# Altium PCB SC8701_EVM_RE0.PcbDoc
Units mil, origin at the board's own origin, x right, y up, seen from the top; angles counter-clockwise.
Board outline 3200 x 2300 mil, 4 copper layers (Top Layer, Signal Layer 1, Signal Layer 2, Bottom Layer), stack 62.449 mil thick; 107 components, 47 nets, 342 pads, 572 vias.
Unrouted connection lines stored in the file: 2.
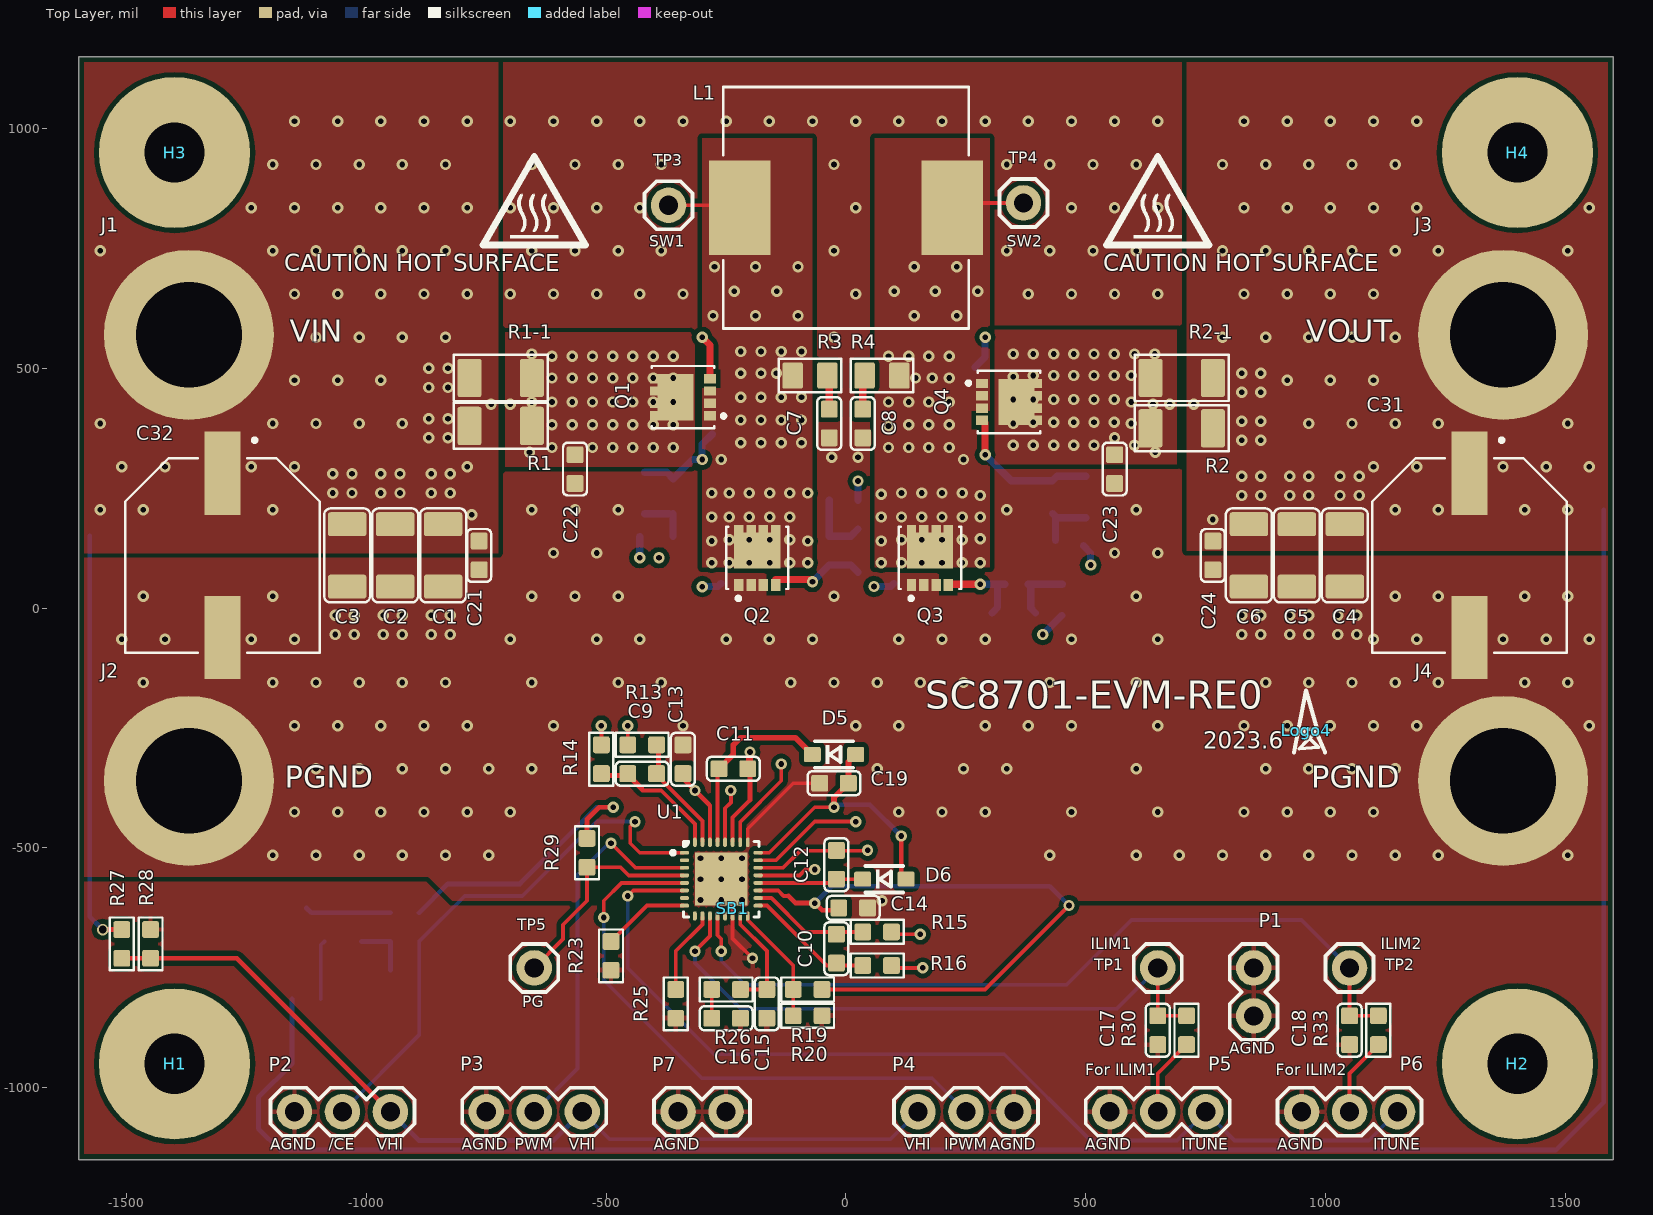
[diagram p0: Top Layer view]
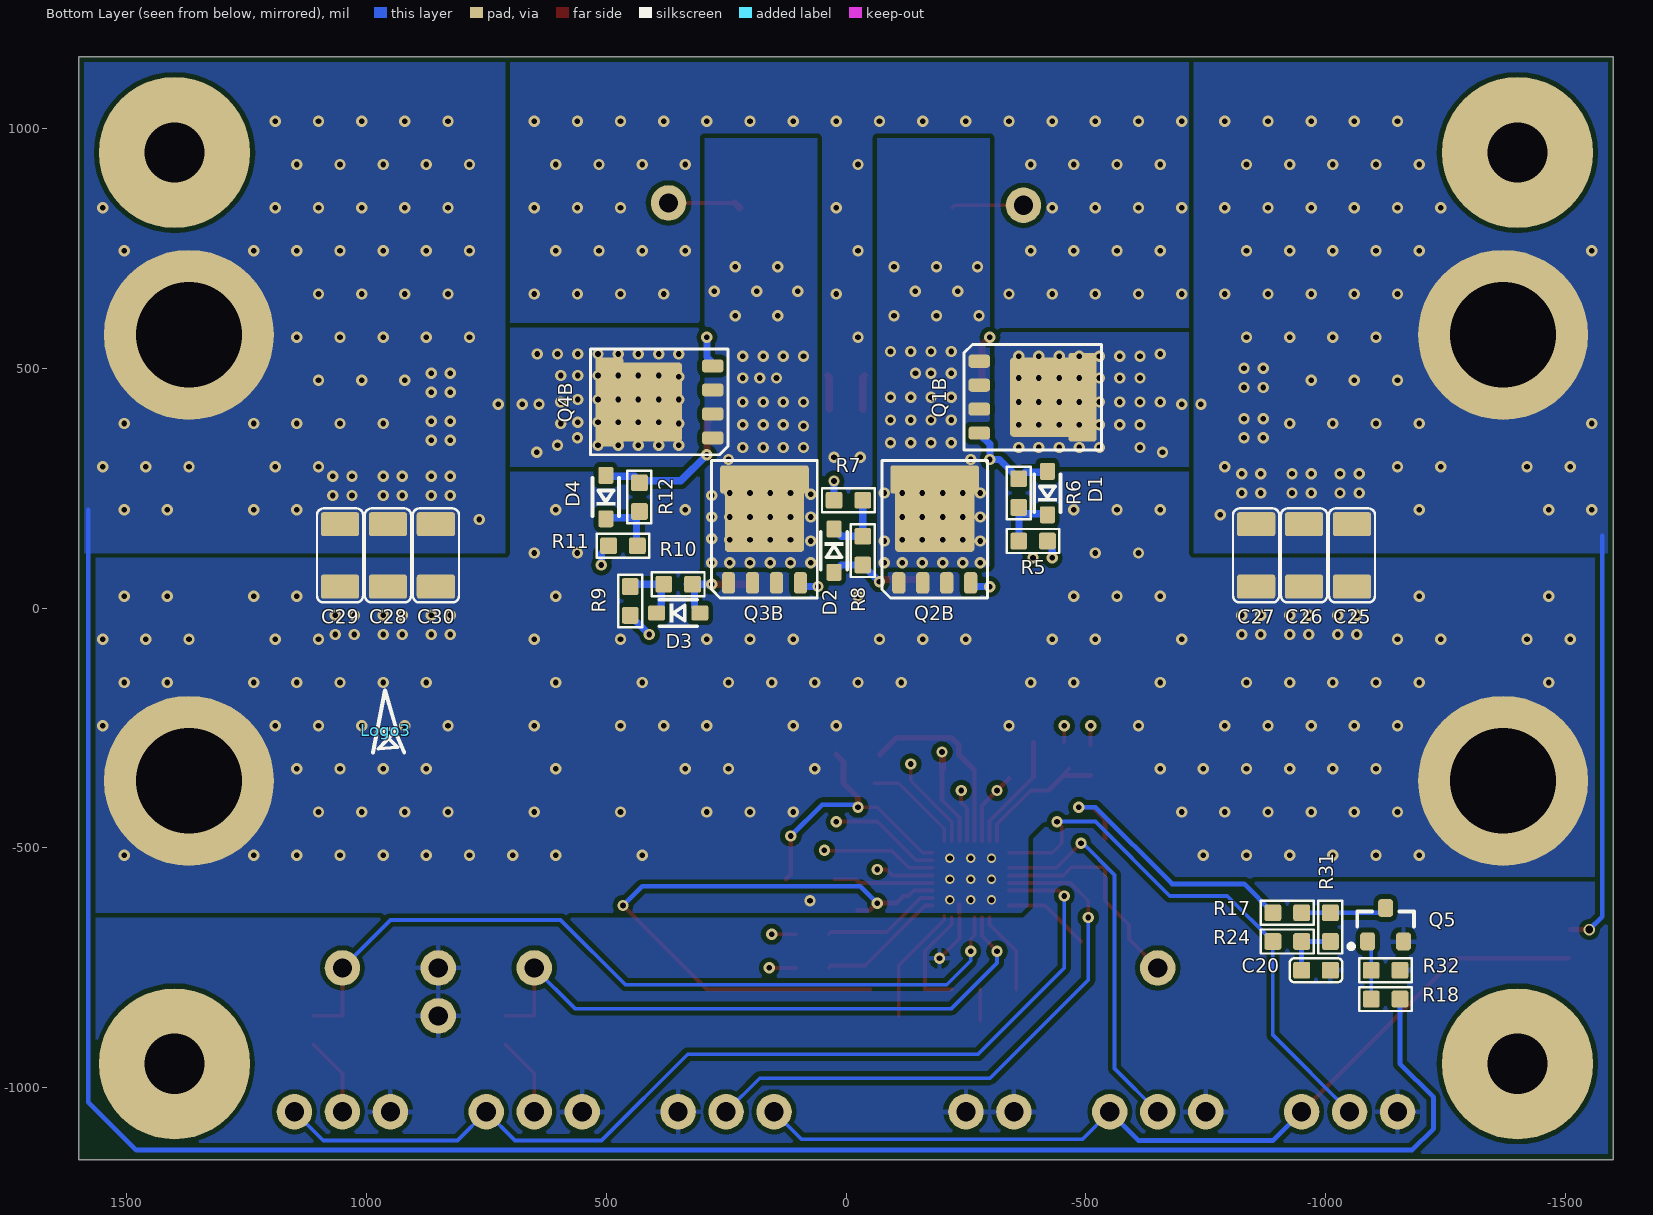
[diagram p1: Bottom Layer view, seen from below]
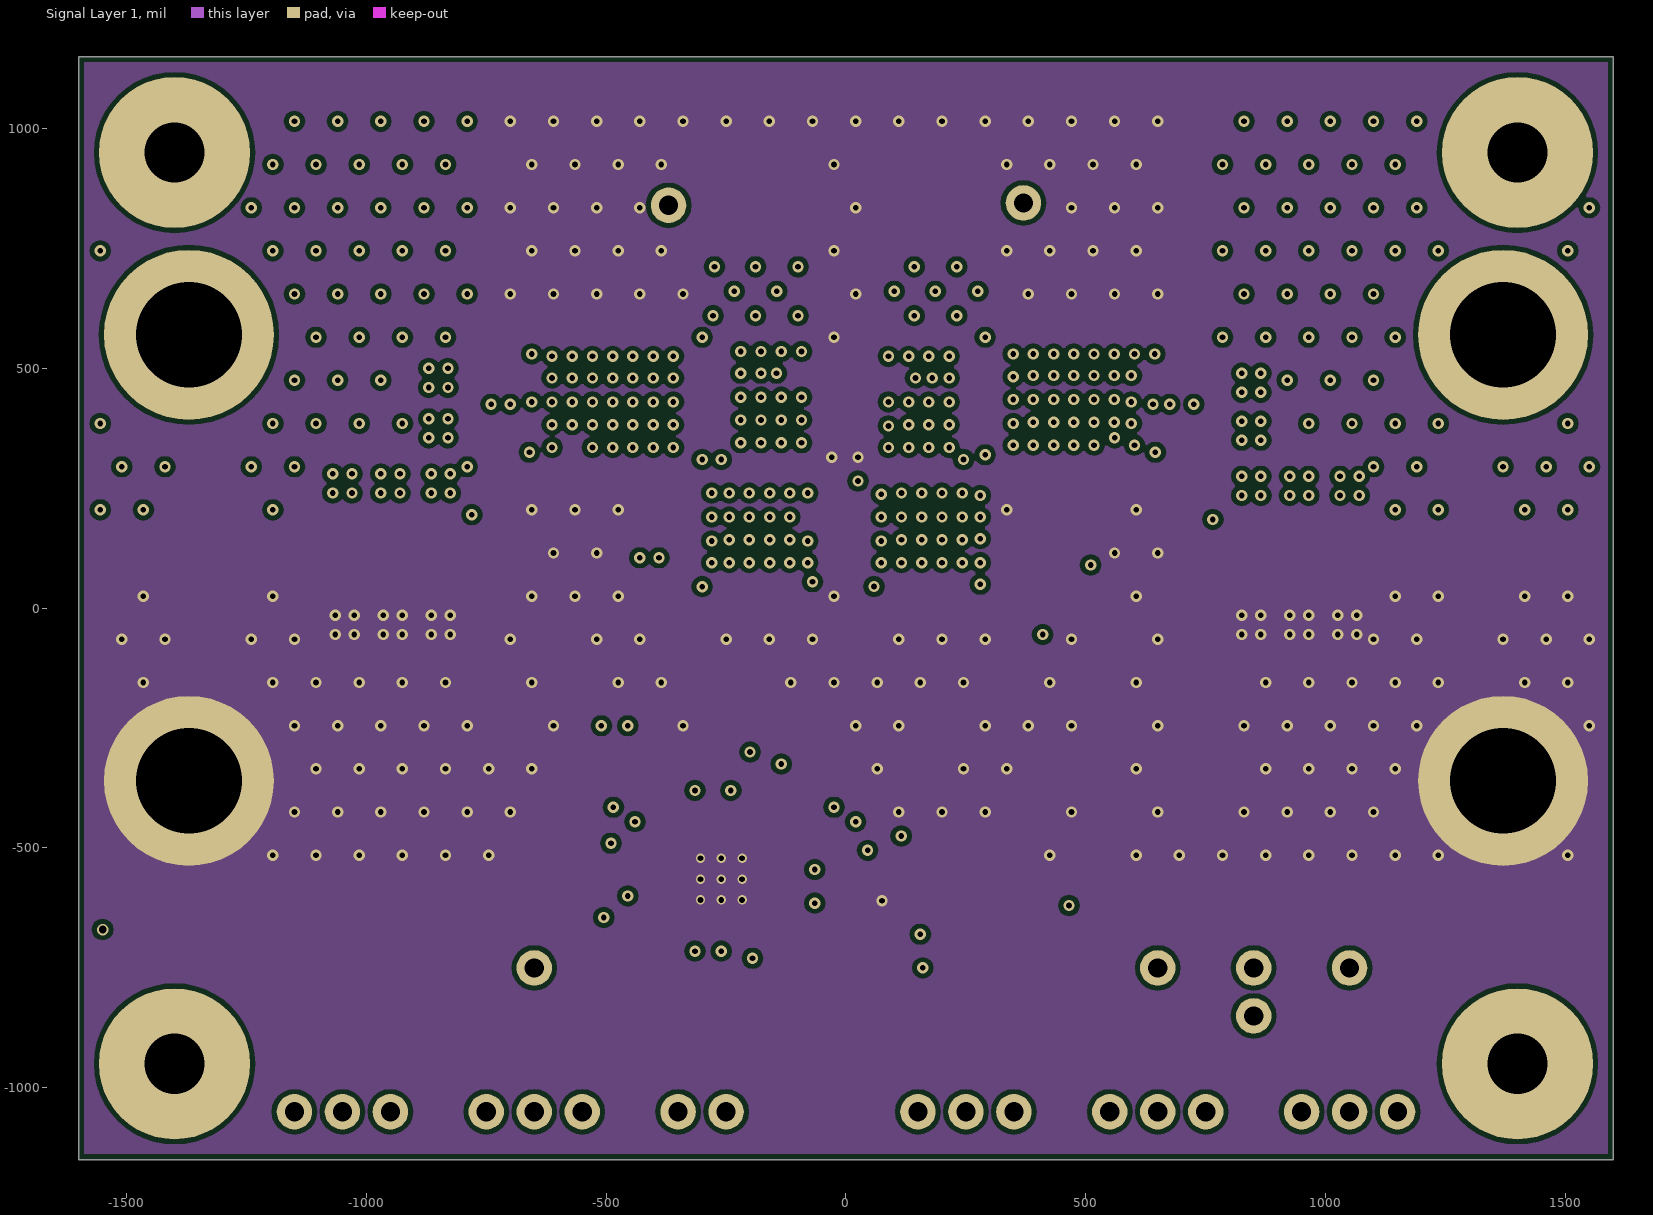
[diagram p2: Signal Layer 1]
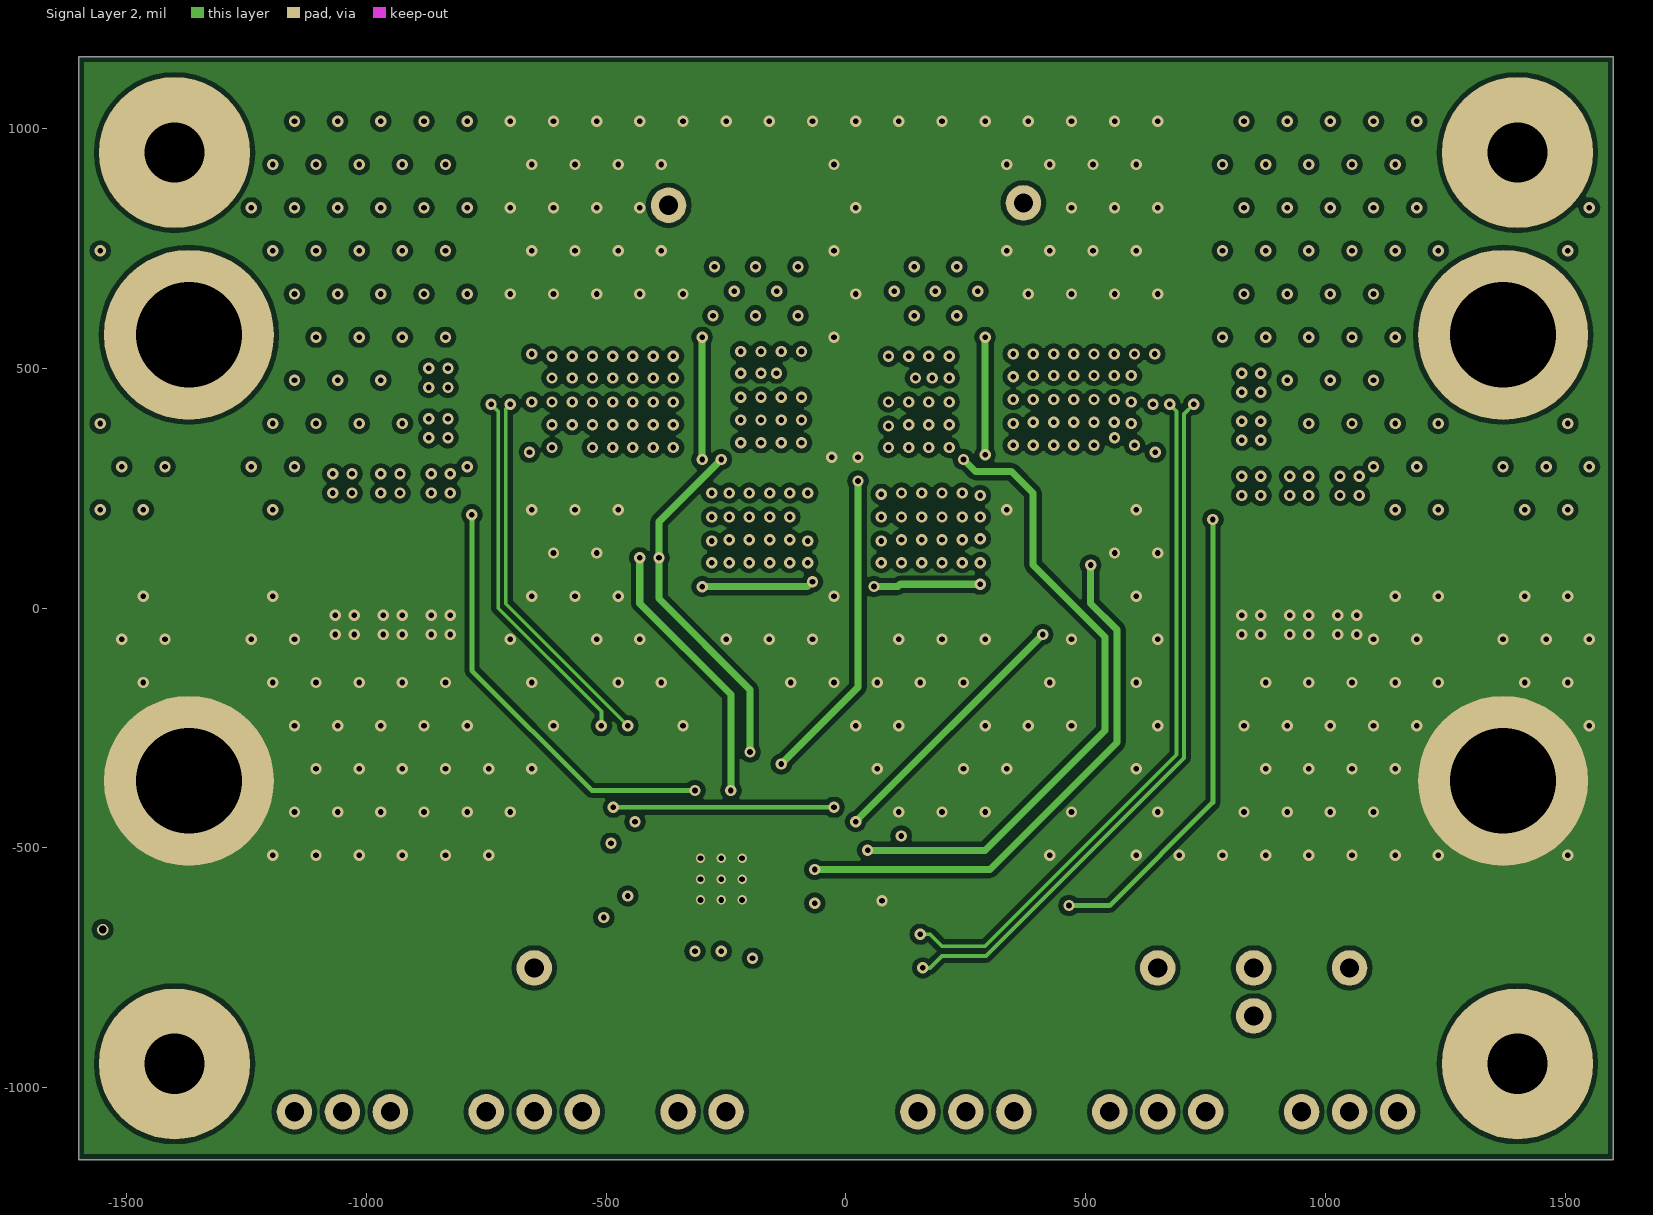
[diagram p3: Signal Layer 2]
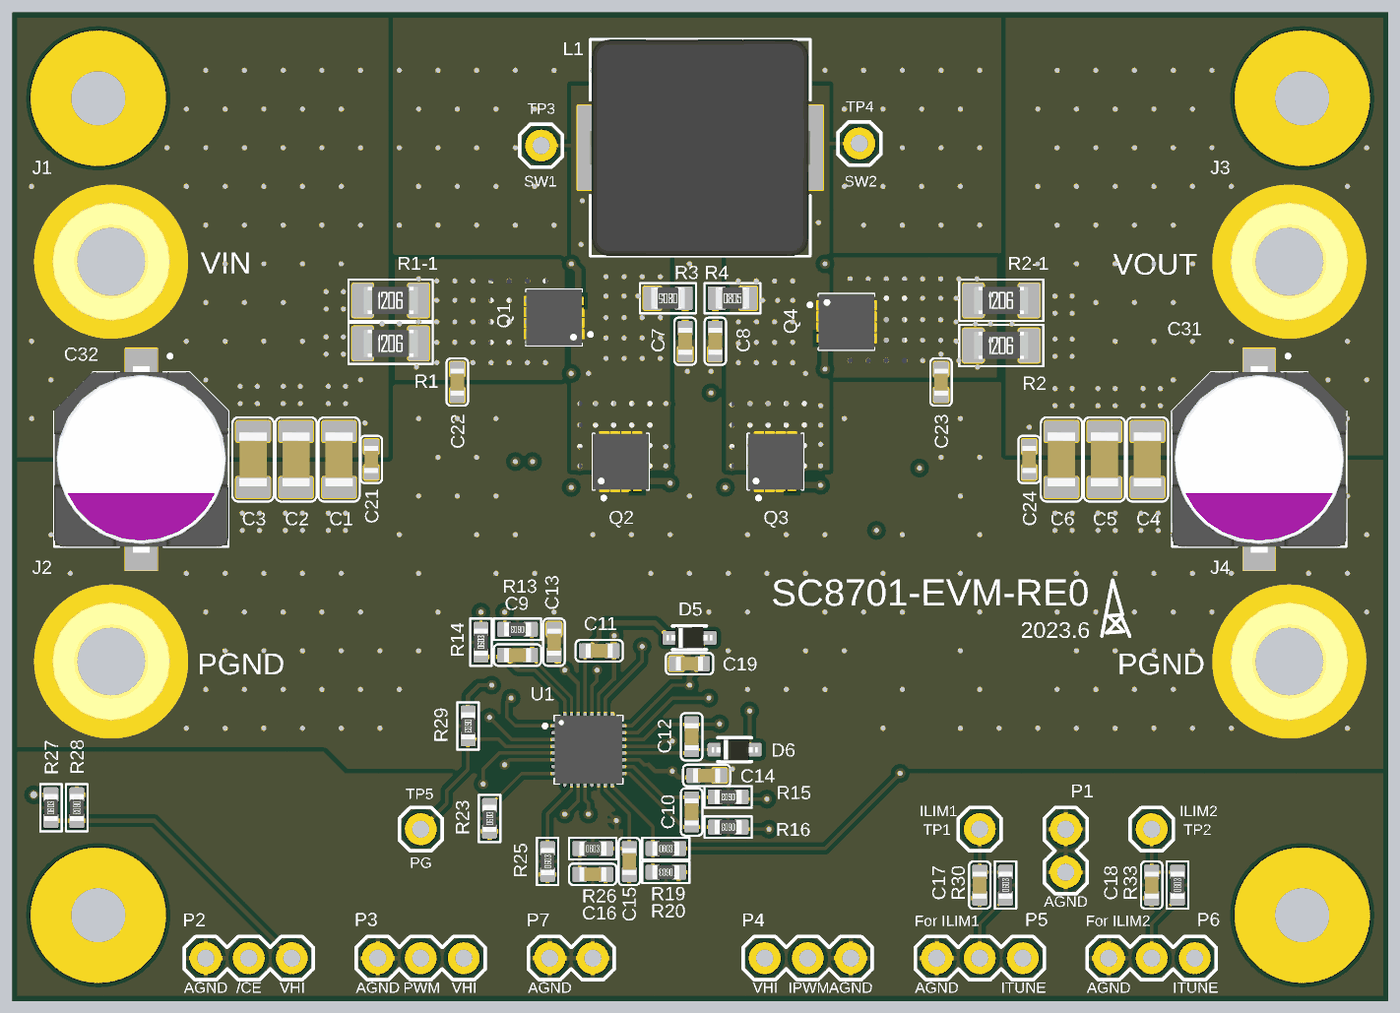
[diagram p4: 3D render of the assembled board from above, using the file's embedded part models]
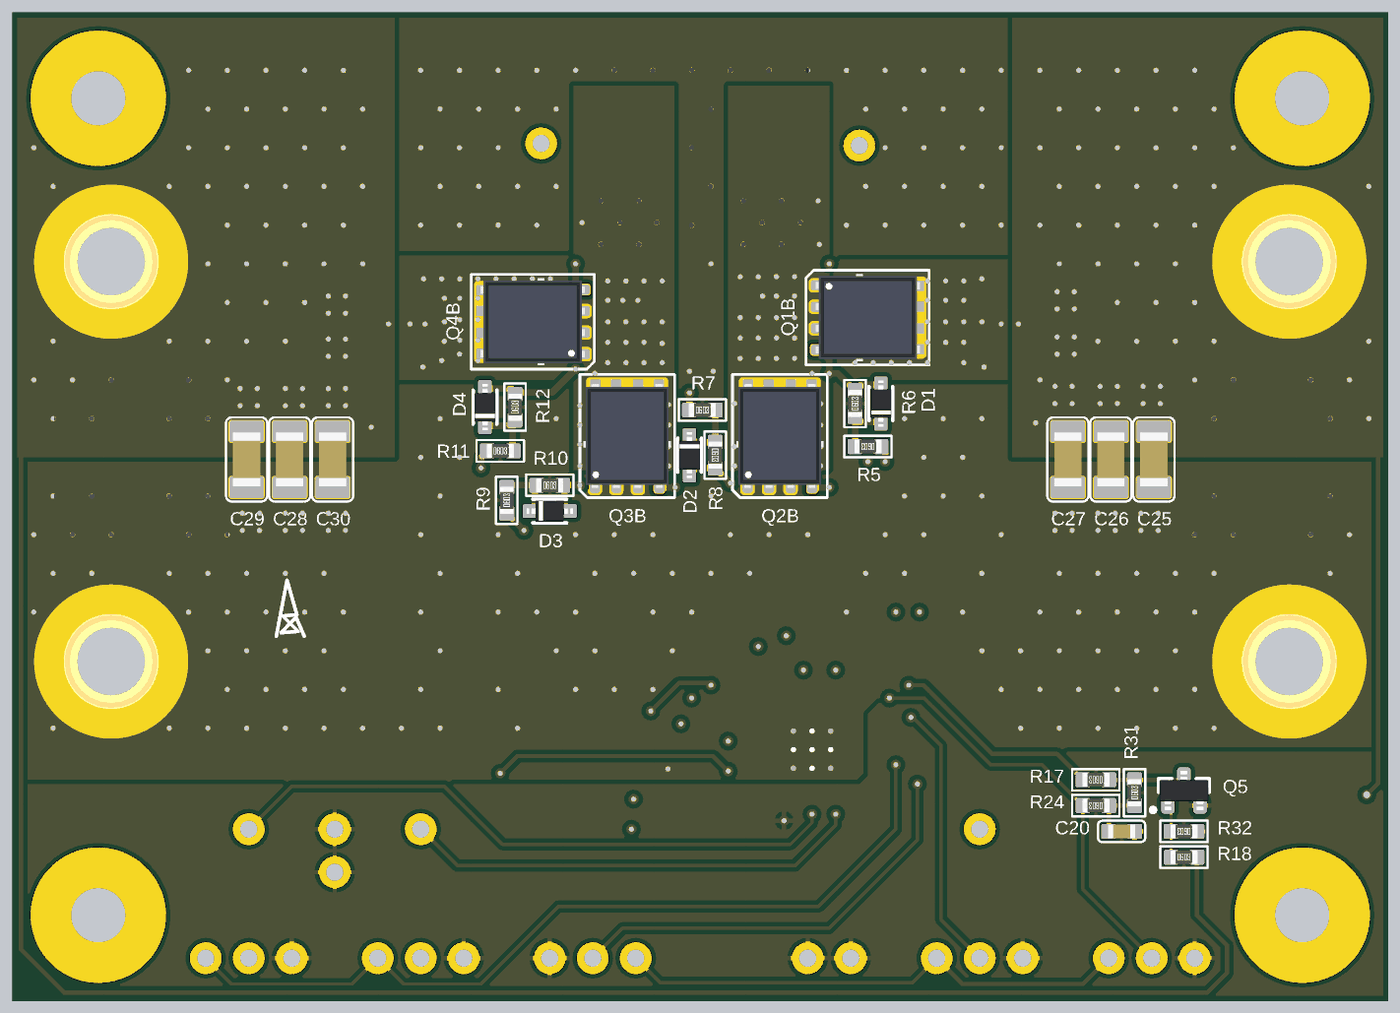
[diagram p5: 3D render of the assembled board from below, using the file's embedded part models]

## Layer stack, top to bottom
Top Solder: solder mask 0.4, Solder Resist, Dk 3.5
Top Layer: signal copper 1.378
Dielectric1: prepreg 8.2835, FR-4, Dk 4.2
Signal Layer 1: signal copper 0.5984
Dielectric2: core 41.9291, Dk 4.2
Signal Layer 2: signal copper 0.5984
Dielectric3: prepreg 8.2835, Dk 4.2
Bottom Layer: signal copper 1.378
Bottom Solder: solder mask 0.4, Solder Resist, Dk 3.5

## Board outline
-1600,-1150 -1600,1150 1600,1150 1600,-1150

## Design rules (kind name [scope] priority, off if disabled: settings)
BoardOutlineClearance [All] p1: gap=11.81 ignorepadtopadclearanceinfootprint=FALSE except(0: Arc-SplitContinuation Track-SplitContinuation SMDPad-SplitContinuation THPad-SplitContinuation Via-SplitContinuation Fill-SplitContinuation Poly-SplitContinuation Region-SplitContinuation Text-SplitContinuation)
Clearance "Stitching VOUT" [IsStitchingVia and InNet('VOUT') vs (IsVia and (Not IsStitchingVia)) Or IsPad] p1: gap=5 ignorepadtopadclearanceinfootprint=FALSE
Clearance "PGND vs via" [(InNet('GND') AND InPolygon) vs IsVia] p2: gap=12 ignorepadtopadclearanceinfootprint=FALSE except(0: Arc-Hole Track-Hole SMDPad-Hole THPad-Hole Via-Hole Fill-Hole Poly-Hole Region-Hole Text-Hole)
Clearance "pour clearance_1" [InPolygon] p3: gap=10 ignorepadtopadclearanceinfootprint=FALSE except(0: Arc-Hole Track-Hole SMDPad-Hole THPad-Hole Via-Hole Fill-Hole Poly-Hole Region-Hole Text-Hole)
Clearance [All] p4: gap=7.8 ignorepadtopadclearanceinfootprint=FALSE except(0: Arc-Hole Track-Hole SMDPad-Hole THPad-Hole Via-Hole Fill-Hole Poly-Hole Region-Hole Text-Hole; 5.91: Arc-Via Track-Via SMDPad-SMDPad)
HoleSize [All] p1: absolutevalues=TRUE maxlimit=270 minlimit=11 maxpercent=80.000 minpercent=20.000
MinimumSolderMaskSliver [All] p1: minsoldermaskwidth=0
PlaneConnect PlaneConnect_1 [(InComponent('J1') AND InComponent('J2') AND InComponent('J3') AND InComponent('J4'))] p1: planeconnectstyle=Direct reliefexpansion=20 reliefentries=4 reliefconductorwidth=10 reliefairgap=10
PlaneConnect PlaneConnect_2 [InNet('AGND') and InNet('GND')] p2: planeconnectstyle=Relief reliefexpansion=20 reliefentries=4 reliefconductorwidth=10 reliefairgap=10
PlaneConnect [All] p3: planeconnectstyle=Direct reliefexpansion=20 reliefentries=4 reliefconductorwidth=10 reliefairgap=10
PolygonConnect AGND [All vs InNet('AGND')] p1: connectstyle=Relief reliefconductorwidth=10 reliefentries=4 polygonreliefangle="90 Angle" airgapwidth=10
PolygonConnect "P1 and P2" [All vs (InComponent('P1') OR InComponent('P2'))] p2: connectstyle=Relief reliefconductorwidth=10 reliefentries=4 polygonreliefangle="90 Angle" airgapwidth=10
PolygonConnect [All] p3: connectstyle=Direct reliefconductorwidth=10 reliefentries=4 polygonreliefangle="90 Angle" airgapwidth=10
RoutingVias [All] p1: holewidth=16 width=24 viastyle="Through Hole" minholewidth=12 minwidth=20 maxholewidth=28 maxwidth=50
ShortCircuit [InNet('AGND') vs InNet('PGND')] p1: allowed=TRUE
SilkToSilkClearance [All] p1 off: silktosilkclearance=7
SilkToSolderMaskClearance [IsPad] p1 off: minsilkscreentomaskgap=7 clearancetoexposedcopper=TRUE
SolderMaskExpansion SolderMaskExpansion_Via [ObjectKind = 'Via'] p1: expansion=2 istentingtop=TRUE
SolderMaskExpansion [All] p2: expansion=2 istentingtop=FALSE
Width [All] p1: maxlimit=30 minlimit=7.8 preferedwidth=7.87
24 further rules are at their usual default settings.

## Components (designator, comment, footprint, x,y, rotation, side; value= is the part's Value field where it differs from the comment)
C1 "10uF/50V" C1206 -840,110 r90 top
C2 "10uF/50V" C1206 -940,110 r90 top
C3 "10uF/50V" C1206 -1040,110 r90 top
C4 "10uF/50V" C1206 1040,110 r90 top
C5 "10uF/50V" C1206 940,110 r90 top
C6 "10uF/50V" C1206 840,110 r90 top
C7 "NC" C0603 -35,385 r90 top
C8 "NC" C0603 35,385 r90 top
C9 "47pF/6.3V" C0603 -425,-345 r0 top
C10 "47pF/6.3V" C0603 -20,-710 r270 top
C11 "100nF/16V" C0603 -235,-335 r0 top
C12 "100nF/16V" C0603 -20,-535 r270 top
C13 "1uF/50V" C0603 -340,-315 r90 top
C14 "1uF/50V" C0603 15,-625 r0 top
C15 "NC" C0603 -165,-825 r90 top
C16 "15nF/6.3V" C0603 -250,-855 r180 top
C17 "10nF/6.3V" C0603 650,-880 r90 top
C18 "10nF/6.3V" C0603 1050,-880 r90 top
C19 "1uF/16V" C0603 -25,-365 r180 top
C20 "1uF/50V" C0603 -980,-755 r180 bottom
C21 "100nF/50V" C0603 -765,110 r90 top
C22 "100nF/50V" C0603 -565,290 r90 top
C23 "100nF/50V" C0603 560,290 r90 top
C24 "100nF/50V" C0603 765,110 r90 top
C25 "10uF/50V" C1206 -1055,110 r90 bottom
C26 "10uF/50V" C1206 -955,110 r90 bottom
C27 "10uF/50V" C1206 -855,110 r90 bottom
C28 "10uF/50V" C1206 955,110 r90 bottom
C29 "10uF/50V" C1206 1055,110 r90 bottom
C30 "10uF/50V" C1206 855,110 r90 bottom
C31 "100uF/50V" "CAP OS-CON D=10.0 L=10.0 F10" 1300,110 r270 top
C32 "100uF/50V" "CAP OS-CON D=10.0 L=10.0 F10" -1300,110 r270 top
D1 "1N4148" SOD-323 -420,240 r270 bottom
D2 "1N4148" SOD-323 25,120 r90 bottom
D3 "1N4148" SOD-323 350,-10 r0 bottom
D4 "1N4148" SOD-323 500.69,231.69 r270 bottom
D5 "1N4148" SOD-323 -25,-305 r180 top
D6 "1N4148" SOD-323 80,-565 r180 top
H1 "HOLE" "M3.2 D=8" -1400,-950 r0 top
H2 "HOLE" "M3.2 D=8" 1400,-950 r0 top
H3 "HOLE" "M3.2 D=8" -1400,950 r0 top
H4 "HOLE" "M3.2 D=8" 1400,950 r0 top
J1 "U6047" JACK_BANANA_U6047 -1370,570 r0 top
J2 "U6047" JACK_BANANA_U6047 -1370,-360 r0 top
J3 "U6047" JACK_BANANA_U6047 1370,570 r0 top
J4 "U6047" JACK_BANANA_U6047 1370,-360 r0 top
L1 "3.3uH" "INDUCTOR 1350 12.6X13.5X5.0mm" 0,835 r0 top
LOGO1 "CAUTION HOT SURFACE" IEC_HotSurface_Small 8980,7100 r0 top
LOGO2 "CAUTION HOT SURFACE" IEC_HotSurface_Small 7680,7100 r0 top
Logo3 "OldGerman Symbol" ODG_LOGO 960,-255 r180 bottom
Logo4 "OldGerman Symbol" ODG_LOGO 960,-255 r0 top
P1 "CONN_X2" 2.54mm_Male_x2 850,-850 r90 top
P2 "CONN_X3" 2.54mm_Male_x3 -950,-1050 r180 top
P3 "CONN_X3" 2.54mm_Male_x3 -750,-1050 r0 top
P4 "CONN_X3" 2.54mm_Male_x3 350,-1050 r180 top
P5 "CONN_X3" 2.54mm_Male_x3 750,-1050 r180 top
P6 "CONN_X3" 2.54mm_Male_x3 950,-1050 r0 top
P7 "CONN_X2" 2.54mm_Male_x2 -350,-1050 r0 top
Q1 "N-MOS_GDS" "SON 3X3 NexFET Q3" -340,440 r180 top
Q1B "N-MOS_GDS" "SO8FL ROUND" -385,440 r180 bottom
Q2 "N-MOS_GDS" "SON 3X3 NexFET Q3" -185,105 r90 top
Q2B "N-MOS_GDS" "SO8FL ROUND" -185,160 r90 bottom
Q3 "N-MOS_GDS" "SON 3X3 NexFET Q3" 175,105 r90 top
Q3B "N-MOS_GDS" "SO8FL ROUND" 170,160 r90 bottom
Q4 "N-MOS_GDS" "SON 3X3 NexFET Q3" 340,430 r0 top
Q4B "N-MOS_GDS" "SO8FL ROUND" 385,430 r0 bottom
Q5 "2N7002" "INFINEON SOT-23-3" -1125,-660 r90 bottom
R1 "10mR" R1206 -720,380 r0 top
R1-1 "NC" R1206 -720,480 r0 top
R2 "10mR" R1206 700,375 r0 top
R2-1 "NC" R1206 700,480 r0 top
R3 "NC" R0805 -75,485 r180 top
R4 "NC" R0805 75,485 r0 top
R5 "0R" R0603 -390,140 r0 bottom
R6 "0R" R0603 -360,240 r90 bottom
R7 "0R" R0603 -5,225 r180 bottom
R8 "0R" R0603 -35,120 r270 bottom
R9 "0R" R0603 450,15 r90 bottom
R10 "0R" R0603 350,50 r180 bottom
R11 "0R" R0603 465,130 r180 bottom
R12 "0R" R0603 430.69,231.69 r90 bottom
R13 "1K" R0603 -510,-315 r90 top
R14 "1K" R0603 -425,-285 r180 top
R15 "1K" R0603 65,-675 r180 top
R16 "1K" R0603 65,-745 r180 top
R17 "200K" R0603 -920,-635 r0 bottom
R18 "10K" R0603 -1125,-815 r180 bottom
R19 "100K" R0603 -80,-795 r0 top
R20 "32.4K" R0603 -80,-850 r180 top
R23 "0R" R0603 -490,-725 r90 top
R24 "100K" R0603 -920,-695 r0 bottom
R25 "68K" R0603 -355,-825 r90 top
R26 "15K" R0603 -250,-795 r0 top
R27 "100K" R0603 -1510,-700 r90 top
R28 "150K" R0603 -1450,-700 r270 top
R29 "100K" R0603 -540,-510 r270 top
R30 "12.1K" R0603 710,-880 r90 top
R31 "100K" R0603 -1010,-665 r90 bottom
R32 "24K" R0603 -1125,-755 r0 bottom
R33 "40.2K" R0603 1110,-880 r90 top
SB1 "NetTie_200um" NetTie_200um -236.38,-626.02 r90 top net-tie
TP1 "CONN_X1_DOT" 2.54mm_Male_x1 650,-750 r0 top
TP2 "CONN_X1_DOT" 2.54mm_Male_x1 1050,-750 r0 top
TP3 "CONN_X1_DOT" 2.54mm_Male_x1 -370,840 r0 top
TP4 "CONN_X1_DOT" 2.54mm_Male_x1 370,845 r0 top
TP5 "CONN_X1_DOT" 2.54mm_Male_x1 -650,-750 r0 top
U1 "SC8701 (A)" "TQFN-32 4X4MM 0.4 VIA" -260,-565 r0 top

## Footprints (in the part's own frame and the unit in brackets; to place one, negate y for a bottom-side part, rotate by r counter-clockwise, add the part's x,y. Pads: shape width x height; smd on the part's side, far side on the other; paste and mask are expansions set on the pad)
2.54mm_Male_x1 [mil]
  round 74 hole 40: 1(0,0)
  silkscreen extent -50,-50 50,50
2.54mm_Male_x2 [mil]
  round 74 hole 40: 1(0,0) 2(100,0)
  silkscreen extent -50,-50 150,50
2.54mm_Male_x3 [mil]
  round 74 hole 40: 1(0,0) 2(100,0) 3(200,0)
  silkscreen extent -50,-50 250,50
C0603 [mil]
  rrect20% 35x35 smd: 1(-30,0) 2(30,0)
  silkscreen extent -55,-25 55,25, body extent -31,-16 32,16, height 32
C1206 [mil]
  rrect20% 50x80 smd: 1(-65,0) 2(65,0)
  silkscreen extent -98,-48 98,48, body extent -63,-32 63,32, height 64
"CAP OS-CON D=10.0 L=10.0 F10" [mm]
  rect 4.4x1.9 smd: 1(-4.35,0) 2(4.35,0)
  silkscreen extent -6.2,-5.15 5.15,5.15, body extent -5.5,-5.15 5.5,5.15, height 10.4
IEC_HotSurface_Small [mil] "CAUTION HOT SURFACE"
  silkscreen extent -8437,-6343 -8223,-6158
"INDUCTOR 1350 12.6X13.5X5.0mm" [mm]
  rect 3.25x5 smd: 1(-5.625,0) 2(5.625,0)
  silkscreen extent -6.5,-6.4 6.5,6.4, body extent -6.5,-6.4 6.5,6.4, height 6.2
"INFINEON SOT-23-3" [mm] "SOT23, 3-Leads, Body 2.90x2.40mm, Pitch 0.95mm, IPC Medium Density"
  rrect50% 0.972x0.802 smd: 1(-0.885,0.95) 2(-0.885,-0.95) 3(0.885,0)
  silkscreen extent -1.27,-1.5 0.7,1.95, body extent -1.16,-1.45 1.16,1.45, height 1
JACK_BANANA_U6047 [mm] "Banana Jack"
  round 9 hole 5.6: 1(0,0)
  body extent -3.49,-3.5 3.49,3.5, height 2
"M3.2 D=8" [mm]
  round 8 hole 3.2: 1(0,0)
NetTie_200um [mm]
  round 0.2 smd paste-2 mask-2: 1(-0.3,0) 2(0.3,0)
  Top Layer region: -0.3,0.1 -0.3,-0.1 0.3,-0.1 0.3,0.1
ODG_LOGO [mil]
  silkscreen extent -26,-46 39,84
R0603 [mil]
  rrect25% 35x35 smd: 1(-30,0) 2(30,0)
  silkscreen extent -55,-25 55,25, body extent -31,-16 31,16, height 18
R0805 [mil]
  rrect20% 42.5x55 smd: 1(-36.26,0) 2(36.26,0)
  silkscreen extent -65,-35 65,35, body extent -39,-25 39,25, height 24
R1206 [mil]
  rrect20% 50x80 smd: 1(-65,0) 2(65,0)
  silkscreen extent -98,-48 98,48, body extent -63,-31 63,31, height 24
"SO8FL ROUND" [mm] "AND9137/D Universal Footprint"
  rrect18% 2.2x4.2 smd paste-10 mask+0.075: D(0,0)
  rect 2.2x4.2 smd paste-10 mask+0.075: D(1.35,0)
  rrect20% 1.5x4.7 smd paste-10 mask+0.075: D(2.75,0)
  rrect50% 1.15x0.7 smd paste-0.05 mask+0.075: G(-2.725,-1.905) S(-2.725,-0.635) S(-2.725,1.905) S(-2.725,0.635)
  rect 0.6x0.9 on Bottom Paste: ""(-0.55,-1.15) ""(-0.55,0) ""(-0.55,1.15) ""(0.3,-1.15) ""(0.3,0) ""(0.3,1.15) ""(1.15,-1.15) ""(1.15,0) ""(1.15,1.15) ""(2,-1.15) ""(2,0) ""(2,1.15)
  rect 0.9x0.6 on Bottom Paste: ""(3,-1.875) ""(3,-0.65) ""(3,0.65) ""(3,1.875)
  silkscreen extent -3.52,-2.79 3.75,2.8, body extent -2.95,-2.58 3.2,2.57, height 1.13
SOD-323 [mm] "AND9137/D：Universal Footprint for  SO8FL Package"
  rrect25% 0.9x0.8 smd: 1(-1.15,0) 2(1.15,0)
  silkscreen extent -1,-0.7 1,0.7, body extent -1.36,-0.62 1.36,0.63, height 1.05
"SON 3X3 NexFET Q3" [mm]
  rect 1.9x2.45 smd paste-1: D(0.39,0)
  rect 0.63x0.5 smd paste-1: D(1.435,0.975) D(1.435,-0.325) D(1.435,0.325) D(1.435,-0.975) G(-1.435,-0.975) S(-1.435,0.975) S(-1.435,-0.325) S(-1.435,0.325)
  silkscreen extent -2.25,-1.65 1.65,1.65, body extent -1.65,-1.65 1.65,1.65, height 1.1
"TQFN-32 4X4MM 0.4 VIA" [mm]
  oval 0.5x0.2 smd: 1(-1.95,1.4) 2(-1.95,1) 3(-1.95,0.6) 4(-1.95,0.2) 5(-1.95,-0.2) 6(-1.95,-0.6) 7(-1.95,-1) 8(-1.95,-1.4) 17(1.95,-1.4) 18(1.95,-1) 19(1.95,-0.6) 20(1.95,-0.2) 21(1.95,0.2) 22(1.95,0.6) 23(1.95,1) 24(1.95,1.4)
  oval 0.2x0.5 smd: 9(-1.4,-1.95) 10(-1,-1.95) 11(-0.6,-1.95) 12(-0.2,-1.95) 13(0.2,-1.95) 14(0.6,-1.95) 15(1,-1.95) 16(1.4,-1.95) 25(1.4,1.95) 26(1,1.95) 27(0.6,1.95) 28(0.2,1.95) 29(-0.2,1.95) 30(-0.6,1.95) 31(-1,1.95) 32(-1.4,1.95)
  rect 2.8x2.8 smd paste-5: 33(0,0)
  silkscreen extent -2.66,-2 2,2, body extent -2,-2 2,2, height 0.55

## Part data
C1 C2 C3 C4 C5 C6 C7 C8 C9 C10 C11 C12 C13 C14 C15 C16 C17 C18 C19 C20 C21 C22 C23 C24 C25 C26 C27 C28 C29 C30: library part CAP, "Capacitor"
C31 C32: library part CAP_Polar_Aluminum, "Capacitor"
D1 D2 D3 D4 D5 D6: library part Diode, "二极管"
J1 J2 J3 J4: library part JACK_BANANA, "Banana Jack", Manufacturer=Keystone, PartNumber=575-8, Supplier Part Number 1=36-575-8-ND, ComponentLink1Description="Datasheet Link", ComponentLink1URL=http://www.keyelco.com/pdfs/M55p95.pdf, CompType=Connector, LatestRevisionDate=2015-08-25, MountType=TH, PackageReference=Keystone575-8, Publisher="Texas Instruments", RoHS=Y, Supplier 1=Digi-Key, U/M=EA
L1: library part Inductor_power, "135 功率电感 额定电流15A"
LOGO1 LOGO2: library part IEC_HotSurface, "IEC 61010-1 Hot Surface Warning", LatestRevisionDate=2014-11-20, Published=2009-03-03, Publisher="Texas Instruments", SymbolCreator=a0412235, SymbolVersion=2011-08-22
Logo3 Logo4: library part OldGeman, LatestRevisionDate=2014-11-20, Published=2009-03-03, Publisher="Texas Instruments", SymbolCreator=a0412235, SymbolVersion=2011-08-22
Q5: library part N-MOS_123, "N-MOS"
R1 R1-1 R2 R2-1 R3 R4 R5 R6 R7 R8 R9 R10 R11 R12 R13 R14 R15 R16 R17 R18 R19 R20 R23 R24 R25 R26 R27 R28 R29 R30 R31 R32 R33: library part RES, "IEC Standard"
SB1: library part "NetTie 0.2mm", "Net Tie", Part number IPS=N.A., Artikkelnr Noca=N.A., Component Class=Connectors, ComponentLink1Description=Datasheet, ComponentLink2Description="Supplier link", Footprint Doc=NetTie, LatestRevisionDate=2019-10-07, Pad Count=2, Part Number="NetTie 0.2mm", PartId=100500654, Pin Count=2, Published=2019-10-07, Publisher="Nordic Semiconductor"
U1: "高效率, 同步, 4 管升降压控制器"

## Via types
v1: diameter 23.62, hole 11.81, Top Layer to Bottom Layer, tented both sides, 562 vias
v2: diameter 19.68, hole 11.81, Top Layer to Bottom Layer, tented both sides, 9 vias
v3: diameter 24, hole 16, Top Layer to Bottom Layer, tented both sides, 1 vias

## Nets (pads, with @x,y where several pads share a name; then routed paths per layer and width w, separated by ;. In a path a pad name is that pad's centre, name@x,y a point inside that pad or via, vN(x,y) a via of type N, cw(c..) or ccw(c..) an arc to the next point about the centre after c; other vN are vias at no path point)
/CE: P2.2 R24.2 U1.1 | length 1142.5
  Top Layer w7.87: v1(-440,-445) -450,-455 -450,-490 -430.12,-509.88 U1.1@-339.72,-509.88
  Bottom Layer w7.87: P2.2 -890,-890 R24.2 -795,-600 -675,-600 -520,-445 v1(-440,-445)
AGND: C15.1 C16.1 C17.1 C18.1 C20.2 P1.1 P1.2 P2.3 P3.1 P4.1 P5.3 P6.1 P7.1 P7.2 Q5.2 R20.1 R23.1 R25.1 R28.1 R32.1 SB1.1 U1.14 | length 102.4
  Top Layer w7.87: U1.14@-236.38,-644.72 -236.38,-688.62 v1(-195,-730)
ILIM1: C17.2 R30.2 TP1.1 U1.11 | length 1307.8
  Top Layer w7.87: v1(-315,-715) -283.62,-683.62 U1.11@-283.62,-644.72 ; TP1.1 C17.2 R30.2
  Bottom Layer w7.87: v1(-315,-715) -315,-740 -220,-835 565,-835 TP1.1
ILIM2: C18.2 R33.2 TP2.1 U1.12 | length 1681.6
  Top Layer w7.87: U1.12@-267.87,-644.72 -267.87,-682.13 -260,-690 v1(-260,-715) ; TP2.1 C18.2 R33.2
  Bottom Layer w7.87: v1(-260,-715) -260,-735 -210,-785 460,-785 595,-650 950,-650 TP2.1
IPWM: P4.2 U1.5 | length 1214.6
  Top Layer w7.87: v1(-505,-645) -505,-610 -467.87,-572.87 U1.5@-339.72,-572.87
  Bottom Layer w7.87: v1(-505,-645) -505,-775 -300,-980 180,-980 P4.2
ITUNE: P5.1 P6.3 U1.6 | length 2098.7
  Top Layer w7.87: v1(-455,-600) -443.62,-588.62 U1.6@-339.72,-588.62
  Bottom Layer w7.87: v1(-455,-600) -455,-750 -275,-930 330,-930 510,-1110 690,-1110 P5.1 810,-1110 1090,-1110 P6.3
NetC7_2: C7.2 R3.1 | length 71.6
  Top Layer w15: R3.1 -34.94,481.2 C7.2@-34.94,414.94
NetC8_2: C8.2 R4.1 | length 71.5
  Top Layer w15: C8.2 35,481.26 R4.1
NetC9_1: C9.1 R13.1 U1.32 | length 329.4
  Top Layer w7.87: C9.1@-465.5,-334.5 -425,-375 ; C9.1@-460,-344 C9.1@-459,-345 ; C9.1@-458,-347 -425,-380 -385.24,-380 -315.12,-450.12 U1.32@-315.12,-485.28
  Top Layer w10: R13.1@-510,-349 C9.1@-460,-349
NetC9_2: C9.2 R14.1 U1.31 | length 245.3
  Top Layer w7.87: C9.2@-391,-352.07 -299.44,-443.63 -299.44,-485.2 U1.31@-299.37,-485.28 ; C9.2@-391,-347.07 C9.2@-391,-345
  Top Layer w10: C9.2@-391,-352.07 -391,-345 R14.1@-391,-280
NetC10_1: C10.1 R15.2 U1.18 | length 247.6
  Top Layer w7.87: U1.18@-180.28,-604.37 -155.63,-604.37 -85,-675 31,-675 R15.2@36,-680
NetC10_2: C10.2 R16.2 U1.17 | length 268.7
  Top Layer w7.87: U1.17@-180.28,-620.12 -164.88,-620.12 -40,-745 31,-745 R16.2@35,-749
NetC11_1: C11.1 D5.2 U1.29 | length 397.1
  Top Layer w7.87: C11.1@-267.95,-336.05 -267.95,-485.2 U1.29@-267.87,-485.28
  Top Layer w12: C11.1 -235,-305 -235,-285 -220,-270 -105.28,-270 D5.2
NetC11_2: C11.2 L1.1 Q1.S Q1B.S Q2.D Q2B.D R3.2 TP3.1 U1.27 | length 1092.9
  Top Layer w7.87: TP3.1 -226.46,840 L1.1 ; U1.27@-236.38,-485.28 -236.38,-436.38 -200,-400
  Top Layer w10: -200,-400 C11.2@-200,-336
  Top Layer w15: C11.2@-201,-335 -201,-301 v1(-200,-300)
  Signal Layer 2 w15: v1(-260,310) -390,180 v1(-390,105) -390,20 -200,-170 v1(-200,-300)
  other v1: -280,95 -243.57,95 -201.43,95 -159.29,95 -117.14,95 -80,95 -280,140 -80,140 -243.57,142.5 -201.43,142.5 -159.29,142.5 -117.14,142.5 -280,190 -243.57,190 -201.43,190 -159.29,190 -117.14,190 -280,240 -243.57,240 -201.43,240 -159.29,240 -117.14,240 -80,240 -219.29,345 -177.14,345 -135,345 -92.86,345 -219.29,392.5 -177.14,392.5 -135,392.5 -92.86,392.5 -219.29,440 -177.14,440 -135,440 -92.86,440 -219.29,490 -177.14,490 -145,490 -219.29,535 -177.14,535 -135,535 -92.86,535 -277.14,610 -188.57,610 -100,610 -232.86,660.83 -144.29,660.83 -274.29,711.67 -188.57,711.67 -100,711.67
NetC12_1: C12.1 L1.2 Q3.D Q3B.D Q4.S Q4B.S R4.2 TP4.1 U1.22 | length 1723
  Top Layer w7.87: U1.22@-180.28,-541.38 -131.38,-541.38 -96,-506 44,-506 v1(45,-505) ; L1.2@231.46,845 TP4.1
  Top Layer w15: L1.2 L1.2@231.46,845
  Signal Layer 2 w15: v1(45,-505) 45.3,-505.3 289.7,-505.3 540,-255 540,-60 390,90 390,240 345,285 270,285 v1(245,310)
  other v1: 73.57,95 115.71,95 157.86,95 200,95 242.14,95 280,95 73.57,140 115.71,142.5 157.86,142.5 200,142.5 242.14,142.5 280,145 73.57,190 115.71,190 157.86,190 200,190 242.14,190 280,190 280,235 73.57,237.5 115.71,240 157.86,240 200,240 242.14,240 88.57,335 130.71,335 172.86,335 215,335 88.57,380 130.71,382.5 172.86,382.5 215,382.5 88.57,430 130.71,430 172.86,430 215,430 145,480 180,480 215,480 88.57,525 130.71,525 172.86,525 215,525 142.14,610 230.71,610 100.71,660.83 186.43,660.83 275,660.83 142.14,711.67 230.71,711.67
NetC12_2: C12.2 D6.2 U1.20 | length 208.3
  Top Layer w7.87: U1.20@-180.28,-572.87 -27.87,-572.87 C12.2 D6.2@24.72,-565
NetC15_2: C15.2 R26.2 U1.15 | length 228.3
  Top Layer w7.87: U1.15@-220.63,-644.72 -220.63,-659.37 -165,-715 C15.2 R26.2
NetC16_2: C16.2 R26.1 | length 65
  Top Layer w7.87: C16.2@-280,-860 C16.2 R26.1
NetC20_1: C20.1 R24.1 R31.1 | length 120
  Bottom Layer w10: R31.1 R24.1 C20.1
NetC22_2: C22.2 Q1.D Q1B.D R1-1.2 R1.2 R14.2 | length 814.6
  Top Layer w7.87: v1(-455,-245) -455,-279 R14.2@-454,-280
  Signal Layer 2 w7.87: v1(-700,425) -709.33,415.67 -709.33,9.33 v1(-455,-245)
  other v1: -660,325 -612.86,335 -528.57,335 -486.43,335 -444.29,335 -402.14,335 -360,335 -612.86,382.5 -570.71,382.5 -528.57,382.5 -486.43,382.5 -444.29,382.5 -402.14,382.5 -360,382.5 -655,430 -612.86,430 -570.71,430 -528.57,430 -486.43,430 -444.29,430 -402.14,430 -360,430 -612.86,480 -570.71,480 -528.57,480 -486.43,480 -444.29,480 -402.14,480 -360,480 -612.86,525 -570.71,525 -528.57,525 -486.43,525 -444.29,525 -402.14,525 -360,525 -655,530
NetC23_2: C23.2 Q4.D Q4B.D R2-1.1 R2.1 R15.1 | length 1497.7
  Top Layer w7.87: R15.1@104,-680 v1(155,-680)
  Signal Layer 2 w7.87: v1(155,-680) 175,-680 200,-705 290,-705 689.33,-305.67 689.33,410.67 v1(675,425)
  other v1: 645,325 348.57,340 390.71,340 432.86,340 475,340 517.14,340 601.43,340 560,355 348.57,385 595,385 390.71,387.5 432.86,387.5 475,387.5 517.14,387.5 559.29,387.5 640,425 595,430 348.57,435 390.71,435 432.86,435 475,435 517.14,435 559.29,435 348.57,482.5 390.71,485 432.86,485 475,485 517.14,485 559.29,485 595,485 348.57,530 390.71,530 432.86,530 475,530 517.14,530 559.29,530 601.43,530 643.57,530
NetD1_1: D1.1 Q1.G Q1B.G R6.2 | length 553.7
  Top Layer w15: v1(-300,565) -283.5,548.5 Q1.G
  Signal Layer 2 w15: v1(-300,310) v1(-300,565)
  Bottom Layer w7.87: Q1B.G@-278.86,361.14 Q1B.G@-278.86,362.76
  Bottom Layer w15: D1.1@-420,283.31 -373.31,283.31 R6.2 -320,310 v1(-300,310) -300,341.61 Q1B.G@-278.86,362.76
NetD1_2: D1.2 R5.2 R6.1 | length 97.4
  Bottom Layer w15: D1.2@-420,196.69 R6.1@-369.31,196.69 ; R5.2@-361,150 R6.1@-361,196.69
NetD2_1: D2.1 Q2.G Q2B.G R8.2 | length 464.5
  Top Layer w15: Q2.G@-146.61,59.84 v1@-74.84,59.84
  Signal Layer 2 w15: v1(-300,45) -80,45 v1(-70,55)
  Bottom Layer w15: v1(-300,45) -266.73,45 Q2B.G@-260,51.73 ; v1(-70,55) R8.2 9.72,90 D2.1
NetD2_2: D2.2 R7.2 R8.1 | length 141.3
  Bottom Layer w15: R7.2 R8.1 9.72,150 D2.2
NetD3_1: D3.1 Q3.G Q3B.G R10.2 | length 450.6
  Top Layer w15: Q3.G@213.23,50 v1(280,50)
  Signal Layer 2 w15: v1(58.37,45.03) 108.37,45.03 113.34,50 v1(280,50)
  Bottom Layer w15: v1(58.37,45.03) 93.27,45 Q3B.G@100,51.73 ; v1(280,50) R10.2@316,50 ; D3.1 316,1.28 R10.2@316,50 ; R10.2@331,50 R10.2@316,50
NetD3_2: D3.2 R9.2 R10.1 | length 134.9
  Bottom Layer w15: R10.1 R9.2@451.67,50 ; R10.1@385,49 385,0.27 D3.2
NetD4_1: D4.1 Q4.G Q4B.G R12.2 | length 627.9
  Top Layer w15: Q4.G@284.84,391.61 290,386.46 v1(290,320)
  Signal Layer 2 w15: v1(290,320) v1(290,565)
  Bottom Layer w15: Q4B.G@268.86,502.24 290,523.39 v1(290,565) ; v1(290,320) 290,319 291,319 344.31,265.69 430.69,265.69 440,275 D4.1@500.69,275
NetD4_2: D4.2 R11.2 R12.1 | length 119.2
  Bottom Layer w15: R12.1@430.69,197.69 436.69,191.69 R11.2@436.69,141.69 ; R12.1@440,188.39 D4.2@500.69,188.39
NetP5_2: P5.2 R30.1 | length 164.9
  Top Layer w7.87: P5.2 650,-970 R30.1
NetP6_2: P6.2 R33.1 | length 164.9
  Top Layer w7.87: P6.2 1050,-970 R33.1
NetQ5_1: Q5.1 R18.1 R32.2 | length 123.2
  Bottom Layer w7.87: R18.1 R32.2 -1095,-702.24 Q5.1
NetQ5_3: Q5.3 R17.1 R31.2 | length 179.1
  Bottom Layer w10: Q5.3 -1115.16,-635 R31.2 R17.1
NetR5_1: R5.1 U1.28 | length 718
  Top Layer w7.87: U1.28@-252.13,-485.28 -252.13,-417.13 -240,-405 v1(-240,-380)
  Signal Layer 2 w15: v1(-430,105) -430,10 -240,-180 v1(-240,-380)
  Bottom Layer w15: v1(-430,105) R5.1@-430,149
NetR7_1: R7.1 U1.26 | length 887
  Top Layer w7.87: U1.26@-220.63,-485.28 -220.63,-445.63 -135,-360 v1@-135,-330
  Signal Layer 2 w15: v1(-135,-325) 25,-165 v1(25,265)
  Bottom Layer w15: R7.1 v1(25,265)
NetR9_1: R9.1 U1.23 | length 841.8
  Top Layer w7.87: U1.23@-180.28,-525.63 -145.63,-525.63 -65,-445 v1(20,-445)
  Signal Layer 2 w15: v1(20,-445) v1(410,-55)
  Bottom Layer w15: v1(410,-55) R9.1
NetR11_1: R11.1 U1.21 | length 1299.1
  Top Layer w7.87: U1.21@-180.28,-557.13 -97.13,-557.13 -85,-545 v1(-65,-545)
  Signal Layer 2 w15: v1(-65,-545) 300,-545 565,-280 565,-45 510,10 v1(510,90)
  Bottom Layer w15: R11.1 510,115 v1(510,90)
NetR19_1: R19.1 R20.2 U1.16 | length 247.5
  Top Layer w7.87: U1.16 -204.88,-650.12 -110,-745 R19.1 R20.2
NetR23_2: R23.2 U1.8 | length 181.3
  Top Layer w7.87: R23.2 -415.12,-620.12 U1.8@-339.72,-620.12
NetR25_2: R25.2 U1.10 | length 173.3
  Top Layer w7.87: R25.2 -355,-715 -299.37,-659.37 U1.10@-299.37,-644.72
PG: R29.2 TP5.1 U1.4 | length 462.9
  Top Layer w7.87: TP5.1 -590,-690 -590,-660 -540,-610 R29.2 -470,-540 -452.87,-557.13 U1.4@-339.72,-557.13
PGND: C1.1 C2.1 C3.1 C4.1 C5.1 C6.1 C7.1 C8.1 C13.2 C14.2 C19.2 C21.1 C22.1 C23.1 C24.1 C25.1 C26.1 C27.1 C28.1 C29.1 C30.1 C31.2 C32.2 J2.1 J4.1 Q2.S Q2B.S Q3.S Q3B.S SB1.2 U1.25 U1.33 | length 210.5
  Top Layer w7.87: U1.25@-204.88,-485.28 -204.88,-460 -109.88,-365 C19.2@-59,-365
  other v1: 75,-610 -1195,-515 -1105,-515 -1015,-515 -925,-515 -835,-515 -745,-515 425,-515 605,-515 695,-515 785,-515 875,-515 965,-515 1055,-515 1145,-515 1235,-515 1505,-515 -1150,-425 -1060,-425 -970,-425 -880,-425 -790,-425 -700,-425 110,-425 200,-425 290,-425 470,-425 650,-425 830,-425 920,-425 1010,-425 1100,-425 -1105,-335 -1015,-335 -925,-335 -835,-335 -745,-335 -655,-335 65,-335 245,-335 335,-335 605,-335 875,-335 965,-335 1055,-335 1145,-335 -1150,-245 -1060,-245 -970,-245 -880,-245 -790,-245 -610,-245 -340,-245 20,-245 110,-245 290,-245 380,-245 470,-245 650,-245 830,-245 920,-245 1010,-245 1100,-245 1190,-245 1550,-245 -1465,-155 -1195,-155 -1105,-155 -1015,-155 -925,-155 -835,-155 -655,-155 -475,-155 -385,-155 -115,-155 -25,-155 65,-155 155,-155 245,-155 425,-155 605,-155 875,-155 965,-155 1055,-155 1145,-155 1235,-155 1415,-155 1505,-155 -1510,-65 -1420,-65 -1240,-65 -1150,-65 -700,-65 -520,-65 -430,-65 -250,-65 -160,-65 -70,-65 110,-65 200,-65 290,-65 470,-65 650,-65 1100,-65 1190,-65 1370,-65 1460,-65 1550,-65 -1065,-55 -1025,-55 -965,-55 -925,-55 -865,-55 -825,-55 825,-55 865,-55 925,-55 965,-55 1025,-55 1065,-55 -1065,-15 -1025,-15 -965,-15 -925,-15 -865,-15 -825,-15 825,-15 865,-15 925,-15 965,-15 1025,-15 1065,-15 -1465,25 -1195,25 -655,25 -565,25 -475,25 -25,25 605,25 1145,25 1235,25 1415,25 1505,25 -610,115 -520,115 560,115 650,115 -655,205 -565,205 -475,205 335,205 605,205 -30,315 25,315 -25,565 -700,655 -610,655 -520,655 -430,655 -340,655 20,655 380,655 470,655 560,655 650,655 -655,745 -565,745 -475,745 -385,745 -25,745 335,745 425,745 515,745 605,745 -700,835 -610,835 -520,835 -430,835 20,835 470,835 560,835 650,835 -655,925 -565,925 -475,925 -385,925 -25,925 335,925 425,925 515,925 605,925 -700,1015 -610,1015 -520,1015 -430,1015 -340,1015 -250,1015 -160,1015 -70,1015 20,1015 110,1015 200,1015 290,1015 380,1015 470,1015 560,1015 650,1015
  other v2: -303.31,-608.31 -260,-608.31 -216.69,-608.31 -303.31,-565 -260,-565 -216.69,-565 -303.31,-521.69 -260,-521.69 -216.69,-521.69
PWM: P3.2 U1.3 | length 800.1
  Top Layer w7.87: v1(-490,-490) -438.62,-541.38 U1.3@-339.72,-541.38
  Bottom Layer w7.87: P3.2 -560,-960 -560,-556.16 -493.84,-490 v1(-490,-490)
VCC: C19.1 D5.1 D6.1 R17.2 R29.1 U1.24 | length 1648.1
  Top Layer w7.87: U1.24@-180.28,-509.88 -159.88,-509.88 -65,-415 v1(-25,-415)
  Top Layer w10: R29.1 -540,-440 -515,-415 v1(-485,-415) ; v1(115,-475) 115,-554.72 D6.1
  Top Layer w12: v1(-25,-415) -25,-395 C19.1 5,-320.28 D5.1
  Signal Layer 2 w10: v1(-485,-415) v1(-25,-415)
  Bottom Layer w10: R17.2 -830,-575 -680,-575 -520,-415 v1(-485,-415) ; v1(-25,-415) -20,-410 50,-410 v1(115,-475)
VHI: P2.1 P3.3 P4.3 R27.1 R28.2 | length 1885.9
  Top Layer w10: R27.1@-1506.29,-730 -1270,-730 P2.1
  Bottom Layer w7.87: P3.3 -492.83,-1107.17 92.83,-1107.17 P4.3
  Bottom Layer w10: P2.1 -890,-1110 -610,-1110 P3.3
VIN: C1.2 C2.2 C3.2 C13.1 C21.2 C25.2 C26.2 C27.2 C32.1 J1.1 R1-1.1 R1.1 R13.2 R27.2 U1.30 | length 2724.4
  Top Layer w7.87: R13.2 v1(-510,-245) ; -285,-410 -283.62,-411.38 U1.30@-283.62,-485.28
  Top Layer w10: v3(-1550,-670) R27.2 ; C13.1@-340,-355 v1(-315,-380) -285,-410
  Signal Layer 2 w7.87: v1(-740,425) -725,410 -725,0 -510,-215 v1(-510,-245)
  Signal Layer 2 w10: v1(-780,195) -780,-130 -530,-380 v1(-315,-380)
  Bottom Layer w10: -1576.83,150.8 -1576.83,-643.17 v3(-1550,-670)
  other v1: -1555,205 -1465,205 -1195,205 -1070,240 -1030,240 -970,240 -930,240 -865,240 -825,240 -1070,280 -1030,280 -970,280 -930,280 -865,280 -825,280 -1510,295 -1420,295 -1240,295 -1150,295 -790,295 -870,355 -830,355 -1555,385 -1195,385 -1105,385 -1015,385 -925,385 -870,395 -830,395 -870,460 -830,460 -1150,475 -1060,475 -970,475 -870,500 -830,500 -1105,565 -1015,565 -925,565 -835,565 -1150,655 -1060,655 -970,655 -880,655 -790,655 -1555,745 -1195,745 -1105,745 -1015,745 -925,745 -835,745 -1240,835 -1150,835 -1060,835 -970,835 -880,835 -790,835 -1195,925 -1105,925 -1015,925 -925,925 -835,925 -1150,1015 -1060,1015 -970,1015 -880,1015 -790,1015
VOUT: C4.2 C5.2 C6.2 C14.1 C24.2 C28.2 C29.2 C30.2 C31.1 J3.1 R2-1.2 R2.2 R16.1 R18.2 R19.2 U1.19 | length 8227.9
  Top Layer w7.87: U1.19@-180.28,-588.62 -141.38,-588.62 -130,-600 -120,-600 ; R19.2 290,-795 v1(465,-620) ; R16.1@104,-750 v1(160,-750)
  Top Layer w10: -120,-600 -105,-615 v1(-65,-615) -50,-630 C14.1@-24,-630
  Signal Layer 2 w7.87: v1(160,-750) 175,-750 200,-725 292.17,-725 705,-312.17 705,405 v1(725,425)
  Signal Layer 2 w10: v1(465,-620) 550,-620 765,-405 v1(765,185)
  Bottom Layer w10: R18.2 -1155,-950 -1225,-1020 -1225,-1085 -1180,-1130 1480,-1130 1580,-1030 1580,205 ; v1(-65,-615) -30,-580 425,-580 v1(465,-620)
  other v1: 1145,205 1235,205 1415,205 1505,205 825,235 865,235 925,235 965,235 1030,235 1070,235 825,275 865,275 925,275 965,275 1030,275 1070,275 1100,295 1190,295 1370,295 1460,295 1550,295 825,350 865,350 965,385 1055,385 1145,385 1235,385 1505,385 825,390 865,390 825,450 865,450 920,475 1010,475 1100,475 825,490 865,490 785,565 875,565 965,565 1055,565 1145,565 830,655 920,655 1010,655 1100,655 785,745 875,745 965,745 1055,745 1145,745 1235,745 1505,745 830,835 920,835 1010,835 1100,835 1190,835 1550,835 785,925 875,925 965,925 1055,925 1145,925 830,1015 920,1015 1010,1015 1100,1015 1190,1015
pads on no net: H1.1 H2.1 H3.1 H4.1 Q1B. Q2B. Q3B. Q4B. U1.2 U1.7 U1.9 U1.13

## Polygon pours and split planes (outlines as drawn)
VOUT on Top Layer "1-VBAT" (solid, remove dead copper, pour order 67): 1660,120 710,120 710,1220 1660,1220
NetC22_2 on Top Layer "Top Layer-No Net" (solid, remove dead copper, pour order 52): -710,575 -710,295 -315,295 -315,575
NetC11_2 on Top Layer "Top Layer-No Net" (solid, remove dead copper, pour order 54): -300,980 -300,85 -70,85 -70,980
NetC12_1 on Top Layer "Top Layer-No Net" (solid, remove dead copper, pour order 56): 60,980 300,980 300,85 60,85
NetC23_2 on Top Layer "Top Layer-No Net" (solid, remove dead copper, pour order 61): 310,580 310,440 310,300 690,300 690,580
AGND on Top Layer "1-AGND" (solid, remove dead copper, pour order 53): -1650,-570 -875,-570 -825,-620 -800,-620 -559,-620 -15,-627.67 -15,-620 540,-620 1705,-620 1695,-660 1705,-670 1705,-1255 -1650,-1255
VIN on Top Layer "1-VBUS" (solid, remove dead copper, pour order 63): -1660,115 -725,115 -725,1215 -1660,1215
PGND on Top Layer "1-PGND" (solid, remove dead copper, pour order 69): -1700,1250 -1700,-1300 1700,-1300 1700,1250
VOUT on Bottom Layer "4-VBAT" (solid, remove dead copper, pour order 68): 710,1175 710,115 1620,115 1620,1175
NetC23_2 on Bottom Layer "Top Layer-No Net" (solid, remove dead copper, pour order 60): 305,585 305,295 700,295 700,585
NetC12_1 on Bottom Layer "Top Layer-No Net" (solid, remove dead copper, pour order 58): 60,980 60,85 295,85 295,980
NetC11_2 on Bottom Layer "Top Layer-No Net" (solid, remove dead copper, pour order 57): -300,980 -300,535 -300,90 -300,85 -65,85 -65,980
NetC22_2 on Bottom Layer "Top Layer-No Net" (solid, remove dead copper, pour order 59): -715,575 -715,295 -310,295 -310,555 -310,575 -405,575 -505,575
AGND on Bottom Layer "4-AGND" (solid, remove dead copper, pour order 55): -1625,-570 -725,-570 -590,-435 -435.94,-435 -390,-480.94 -390,-625 -370,-645 1655,-645 1655,-1220 -1625,-1220
VIN on Bottom Layer "4-VBUS" (solid, remove dead copper, pour order 66): -1670,115 -725,115 -725,1210 -1670,1210
PGND on Bottom Layer "4-PGND" (solid, remove dead copper, pour order 70): -1700,1250 -1700,-1250 1700,-1250 1700,1250
PGND on Signal Layer 2 "3-PGND" (solid, remove dead copper, pour order 22): -1700,1250 -1700,-1250 1700,-1250 1700,1250
PGND on Signal Layer 1 "2-PGND" (solid, remove dead copper, pour order 71): -1700,1250 -1700,-1250 1700,-1250 1700,1250

## Silkscreen, mask and mechanical layers (free items; w line width, h text height)
Top Overlay:
  text "SW1" at -410,745 h40
  text "SW2" at 335,745 h40
  text "VIN" at -1160,540 h80
  text "VOUT" at 960,540 h80
  text "SC8701-EVM-RE0" at 165,-230 h100
  text "2023.6" at 745,-305 h60
  text "PGND" at -1170,-390 h80
  text "PGND" at 970,-390 h80
  text "ILIM1" at 510,-720 h40
  text "ILIM2" at 1115,-720 h40
  text "PG" at -675,-840 h40
  text "AGND" at 799.35,-937.8 h40
  text "For ILIM1" at 498.37,-982.62 h40
  text "For ILIM2" at 896.03,-982.62 h40
  text "AGND" at -1200.65,-1137.8 h40
  text "/CE" at -1078.81,-1137.78 h40
  text "VHI" at -978.06,-1137.78 h40
  text "AGND" at -800.65,-1137.8 h40
  text "PWM" at -690.93,-1137.78 h40
  text "VHI" at -578.06,-1137.78 h40
  text "AGND" at -400.65,-1137.8 h40
  text "VHI" at 121.94,-1137.78 h40
  text "IPWM" at 204.41,-1137.78 h40
  text "AGND" at 299.35,-1137.8 h40
  text "AGND" at 499.35,-1137.8 h40
  text "ITUNE" at 699.06,-1137.58 h40
  text "AGND" at 899.35,-1137.8 h40
  text "ITUNE" at 1099.06,-1137.58 h40
Mechanical 1:
  the board outline again, w10